# Altium PCB E-41 LIDAR Dev Brd.PcbDoc
Units mil, origin at the board's own origin, x right, y up, seen from the top; angles counter-clockwise.
Board outline 5885.62 x 2540.57 mil, 2 copper layers (Top Layer, Bottom Layer); 41 components, 69 nets, 243 pads, 60 vias.
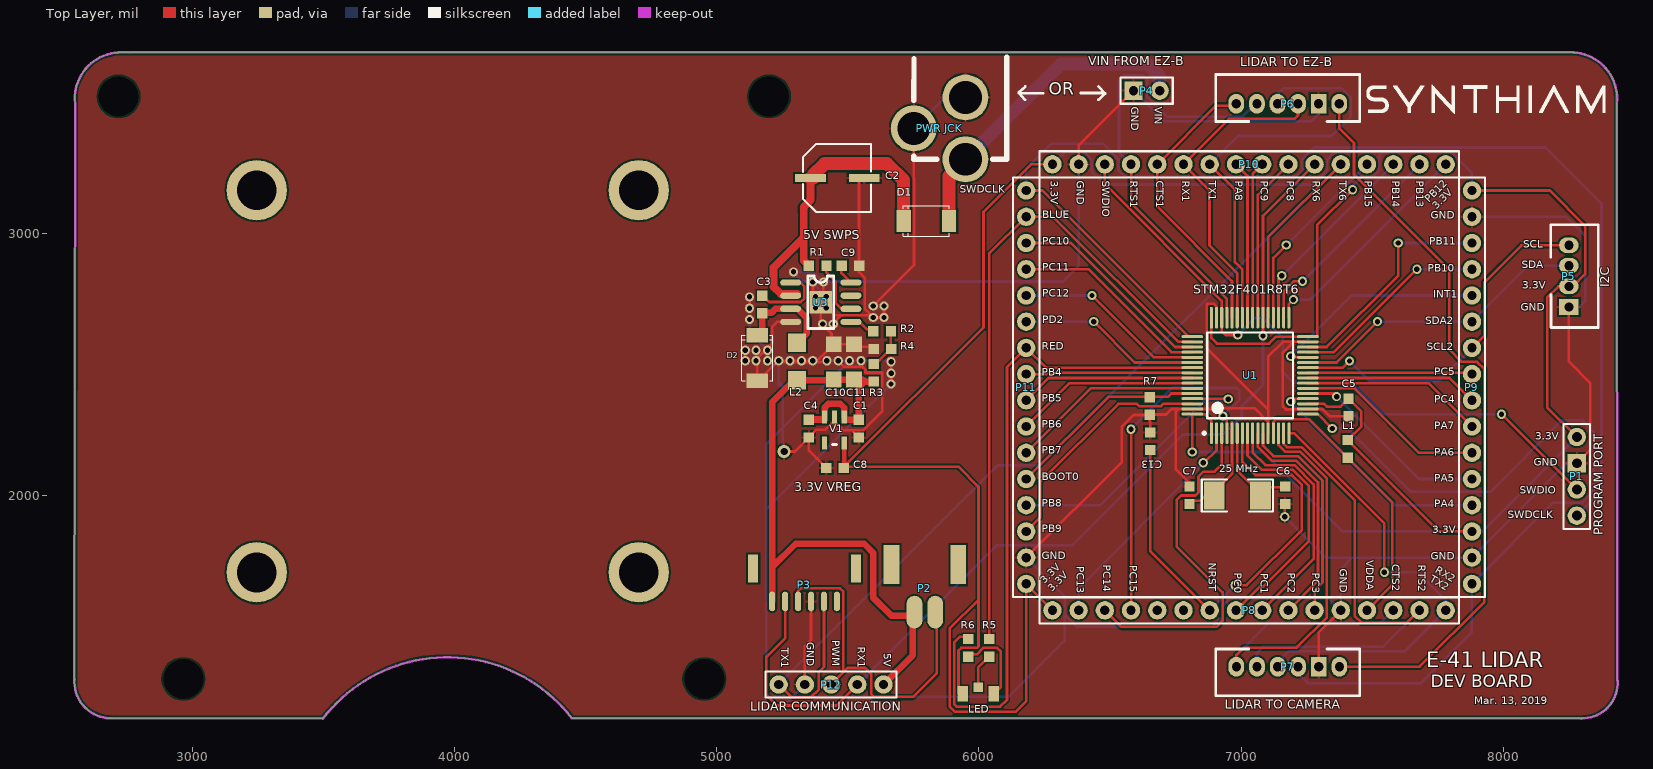
[diagram p0: Top Layer view]
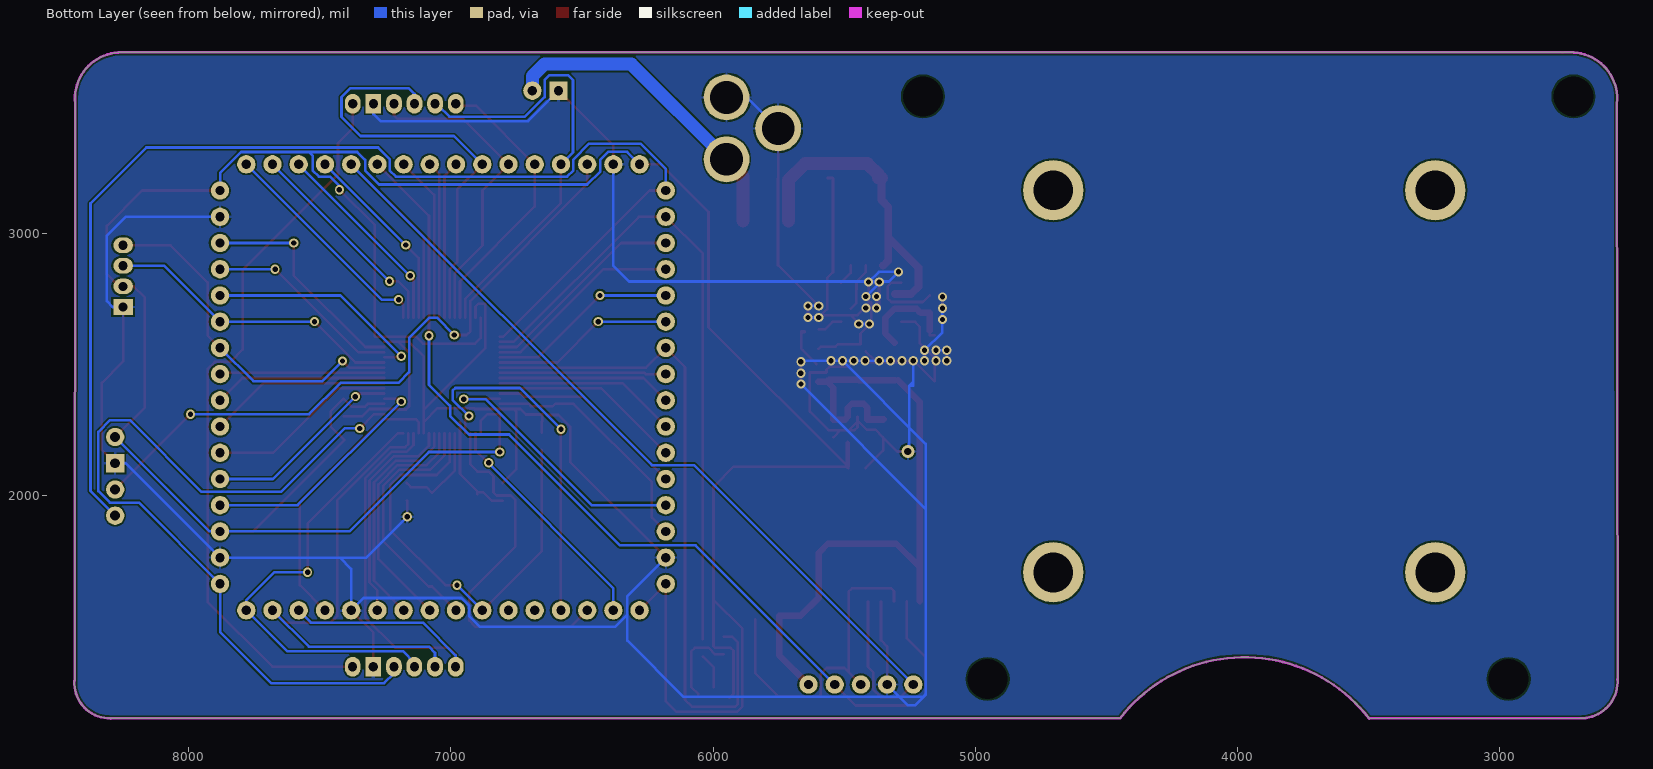
[diagram p1: Bottom Layer view, seen from below]

## Layer stack, top to bottom
Top Layer: signal copper 1.4
Dielectric: dielectric 12.6, FR-4, Dk 4.8
Bottom Layer: signal copper 1.4

## Board outline
2550.34,1299.98 ccw(c2689.42,1289.72) 2695.07,1150.37 3497.51,1149.37 cw(c3973,782.32) 4447.95,1150.07 4448,1150.11 8297.32,1149.55 8297.32,1150.35 ccw(c8300.9,1285.08) 8435.44,1292.97 8434.92,1292.97 8432.36,3495.82 ccw(c8257.9,3514.42) 8254.26,3689.83 8254.26,3689.95 2730.74,3689.95 2730.74,3689.83 ccw(c2727.1,3514.42) 2552.64,3495.82

## Design rules (kind name [scope] priority, off if disabled: settings)
Clearance [All] p1: gap=7
PolygonConnect PolygonConnect_6 [All vs IsNamedPolygon('Top Layer-GND')] p1: connectstyle=Direct reliefconductorwidth=10 reliefentries=4 polygonreliefangle="90 Angle"
PolygonConnect PolygonConnect_5 [All vs IsNamedPolygon('btm Layer-GND')] p2: connectstyle=Direct reliefconductorwidth=10 reliefentries=4 polygonreliefangle="90 Angle"
PolygonConnect PolygonConnect_4 [All vs IsNamedPolygon('Top Layer-GND')] p3: connectstyle=Direct reliefconductorwidth=10 reliefentries=4 polygonreliefangle="90 Angle"
PolygonConnect PolygonConnect_3 [All vs IsNamedPolygon('btm Layer-GND')] p4: connectstyle=Direct reliefconductorwidth=10 reliefentries=4 polygonreliefangle="90 Angle"
PolygonConnect PolygonConnect_2 [All vs IsNamedPolygon('btm Layer-GND')] p5: connectstyle=Direct reliefconductorwidth=10 reliefentries=4 polygonreliefangle="90 Angle"
PolygonConnect PolygonConnect_1 [All vs IsNamedPolygon('Top Layer-GND')] p6: connectstyle=Direct reliefconductorwidth=10 reliefentries=4 polygonreliefangle="90 Angle"
PolygonConnect [All] p7: connectstyle=Relief reliefconductorwidth=10 reliefentries=4 polygonreliefangle="90 Angle"
RoutingVias [All] p1: holewidth=20 width=35 viastyle="Through Hole" minholewidth=20 minwidth=20 maxholewidth=28 maxwidth=50
SilkscreenOverComponentPads [All] p1: minsilkscreentomaskgap=10
SolderMaskExpansion [All] p1: expansion=4
Width Width_6 [InNet('3.3V')] p1: maxlimit=25 minlimit=7 preferedwidth=10 minimp=50.000000 maximp=50.000000 favimp=50.000000
Width Width_5 [InNet('GND')] p2: maxlimit=25 minlimit=10 preferedwidth=10 minimp=50.000000 maximp=50.000000 favimp=50.000000
Width Width_4 [InNet('NetC3_2') OR InNet('NetR11_1') OR InNet('NetC14_2')  OR InNet('NetR8_1') OR InNet('NetR8_2')] p3: maxlimit=50 minlimit=10 preferedwidth=25 minimp=50.000000 maximp=50.000000 favimp=50.000000
Width Width_3 [InNet('5V')] p4: maxlimit=50 minlimit=10 preferedwidth=25 minimp=50.000000 maximp=50.000000 favimp=50.000000
Width Width_2 [InNet('VIN') OR InNet('INPUT')] p5: maxlimit=125 minlimit=10 preferedwidth=50 minimp=50.000000 maximp=50.000000 favimp=50.000000
Width Width_1 [InNet('V+')] p6: maxlimit=125 minlimit=10 preferedwidth=10 minimp=50.000000 maximp=50.000000 favimp=50.000000
Width [All] p7: maxlimit=10 minlimit=10 preferedwidth=10
27 further rules are at their usual default settings.

## Components (designator, comment, footprint, x,y, rotation, side; value= is the part's Value field where it differs from the comment)
"25 MHz" "XTAL" Crystal 6986.5,2000.5 r0 top
C1 "Cap" "0603 TIGHT" 5541,2255 r270 top locked
C2 "35V" "SMD Capacitor 220uf 16V" 5458,3211 r90 top
C3 "100nF" "0603 TIGHT" 5173.68,2728.5 r270 top locked
C4 "Cap" "0603 TIGHT" 5351,2255 r270 top locked
C5 "Cap" "0603 TIGHT" 7409,2336 r270 top
C6 "Cap" "0603 TIGHT" 7167.5,2001 r270 top
C7 "Cap" "0603 TIGHT" 6803,2001 r90 top
C8 "Cap" "0603 TIGHT" 5451,2105 r180 top locked
C9 "Cap" "0603 TIGHT" 5509.68,2876.5 r180 top locked
C10 "10V" 1206 5445.68,2442 r90 top locked
C11 "10V" 1206 5523.18,2442 r90 top locked
C13 "Cap" "0603 TIGHT" 6653,2207 r90 top
D1 "30V 5A" "DIODE SOD-128" 5799,3047 r90 top
D2 "30V 5A" "DIODE SOD-128" 5154.68,2524.3 r0 top locked
L1 "Ferrite" "0603 TIGHT" 7406,2178 r270 top
L2 "Ferrite" "Inductor SMD" 5306.18,2511.5 r270 top locked
LED "BI-CLR" "LED BI-COLOR" 5997,1243 r180 top (schematic designator LED1)
P1 "Header 4" HDR1X4 8280,2223 r270 top
P2 "Header 2" "JST-PH 2-pin" 5793.5,1646 r0 top
P3 "Header 6" "JST-GH 6-pin" 5334.5,1659 r0 top
P4 "Header 2" HDR1X2 6689,3544 r180 top
P5 "JST 4-pin" "JST-PH 4pin" 8252,2837 r90 top
P6 "Camera Port" "JST-PH 6pin"#1 7177.61,3494 r180 top
P7 "Camera Port" "JST-PH 6pin"#2 7178,1347 r0 top
P8 "Header 16" HDR1X16 6280,1562 r0 top
P9 "Header 16" HDR1X16 7880,1663 r90 top
P10 "Header 16" HDR1X16 7780,3263 r180 top
P11 "Header 16" HDR1X16 6180,3163 r270 top
P12 "Header 5" HDR1X5 5636,1279 r180 top
"PWR JCK" "PWR2.1" "POWER JACK SLOTS" 5850,3400 r180 top
R1 "Res1" "0603 TIGHT" 5384.68,2876.5 r180 top locked
R2 "Res1" "0603 TIGHT" 5630.68,2626.5 r180 top locked
R3 "Res1" "0603 TIGHT" 5599.18,2468 r270 top locked
R4 "Res1" "0603 TIGHT" 5631.5,2559 r0 top locked
R5 "Res1" "0603 TIGHT" 6039,1419 r270 top
R6 "Res1" "0603 TIGHT" 5959,1419 r270 top
R7 "Res1" "0603 TIGHT" 6651,2341 r90 top
U1 "STM32F401R8T6" LQFP64_M 7034,2458 r90 top
U3 "RT8299GSP" SOP-8 5396.68,2737 r0 top locked
V1 "SPX3819M5-L-3-3/TR" SOT-25 5411,2200 r0 top locked

## Footprints (in the part's own frame and the unit in brackets; to place one, negate y for a bottom-side part, rotate by r counter-clockwise, add the part's x,y. Pads: shape width x height; smd on the part's side, far side on the other; paste and mask are expansions set on the pad)
"0603 TIGHT" [mm]
  rect 1x1 smd: 1(-0.85,0) 2(0.85,0)
1206 [mil]
  rect 60x60 smd: 1(0,0) 2(135,0)
Crystal [mm] "16Mhz Crystal"
  rect 2x2.7 smd: 1(-2.276,-0.01) 2(2.22,-0.01)
  silkscreen extent -3.48,-1.57 3.43,1.54
"DIODE SOD-128" [mm]
  rect 2.1x1.4 smd: 1(0,-2.2) 2(0,2.2)
  silkscreen extent -1.49,-2.21 1.49,2.23
HDR1X2 [mil] "Connector; Header; 2 Position"
  round 70 hole 35.43: 1(0,0)
  rect 70x70 hole 35.43: 2(100,0)
  silkscreen extent -50,-50 150,50
HDR1X4 [mil] "Connector; Header; 4 Position"
  round 70 hole 38: 1(0,0) 3(200,0) 4(300,0)
  rect 70x70 hole 38: 2(100,0)
  silkscreen extent -50,-50 350,50
HDR1X5 [mil] "Connector; Header; 5 Position"
  round 70 hole 35.43: 1(0,0) 2(100,0) 3(200,0) 4(300,0) 5(400,0)
  silkscreen extent -50,-50 450,50
HDR1X16 [mil] "Connector; Header; 16 Position"
  round 70 hole 35.43: 1(0,0) 2(100,0) 3(200,0) 4(300,0) 5(400,0) 6(500,0) 7(600,0) 8(700,0) 9(800,0) 10(900,0) 11(1000,0) 12(1100,0) 13(1200,0) 14(1300,0) 15(1400,0) 16(1500,0)
  silkscreen extent -50,-50 1550,50
"Inductor SMD" [mil]
  rect 70x70 smd: 1(-71.5,0) 2(71.5,0)
"JST-GH 6-pin" [mm]
  rect 1x2.7 smd: 0(-4.985,1.604) 0(4.985,1.604)
  oval 0.6x1.9 smd: 1(-3.136,-1.604) 2(-1.88,-1.604) 3(-0.624,-1.604) 4(0.632,-1.604) 5(1.887,-1.604) 6(3.143,-1.604)
"JST-PH 2-pin" [mil]
  rect 60x150 smd: 0(-127.24,90.65) 0(127.24,90.65)
  oval 60x125 smd: 1(-39.35,-90.65) 2(39.39,-90.65)
"JST-PH 4pin" [mil]
  rect 60x75 hole 35: 1(-118.11,2.36)
  oval 60x75 hole 35: 2(-39.37,2.36) 3(39.37,2.36) 4(117.32,2.36)
  silkscreen extent -196,-109 195,71
"JST-PH 6pin"#1 [mil]
  oval 60x75 hole 35: 1(-196.46,0) 3(-38.98,0) 4(38.98,0) 5(117.72,0) 6(196.46,0)
  rect 60x75 hole 35: 2(-117.72,0)
  silkscreen extent -274,-111 274,68
"JST-PH 6pin"#2 [mil]
  oval 60x75 hole 35: 1(-196.46,0) 2(-117.72,0) 3(-38.98,0) 4(38.98,0) 6(196.46,0)
  rect 60x75 hole 35: 5(117.72,0)
  silkscreen extent -274,-111 274,68
"LED BI-COLOR" [mm]
  rect 1x1.5 smd: 1(-1.5,0) 2(1.5,0)
  rect 0.9x0.9 smd: 3(0,-0.656)
LQFP64_M [mm] "Thin QFP, 64-Leads, Body 10x10mm, Pitch 0.5mm, IPC Low Density"
  oval 2.1x0.3 smd: 1(-5.6,3.75) 2(-5.6,3.25) 3(-5.6,2.75) 4(-5.6,2.25) 5(-5.6,1.75) 6(-5.6,1.25) 7(-5.6,0.75) 8(-5.6,0.25) 9(-5.6,-0.25) 10(-5.6,-0.75) 11(-5.6,-1.25) 12(-5.6,-1.75) 13(-5.6,-2.25) 14(-5.6,-2.75) 15(-5.6,-3.25) 16(-5.6,-3.75) 33(5.6,-3.75) 34(5.6,-3.25) 35(5.6,-2.75) 36(5.6,-2.25) 37(5.6,-1.75) 38(5.6,-1.25) 39(5.6,-0.75) 40(5.6,-0.25) 41(5.6,0.25) 42(5.6,0.75) 43(5.6,1.25) 44(5.6,1.75) 45(5.6,2.25) 46(5.6,2.75) 47(5.6,3.25) 48(5.6,3.75)
  oval 0.3x2.1 smd: 17(-3.75,-5.6) 18(-3.25,-5.6) 19(-2.75,-5.6) 20(-2.25,-5.6) 21(-1.75,-5.6) 22(-1.25,-5.6) 23(-0.75,-5.6) 24(-0.25,-5.6) 25(0.25,-5.6) 26(0.75,-5.6) 27(1.25,-5.6) 28(1.75,-5.6) 29(2.25,-5.6) 30(2.75,-5.6) 31(3.25,-5.6) 32(3.75,-5.6) 49(3.75,5.6) 50(3.25,5.6) 51(2.75,5.6) 52(2.25,5.6) 53(1.75,5.6) 54(1.25,5.6) 55(0.75,5.6) 56(0.25,5.6) 57(-0.25,5.6) 58(-0.75,5.6) 59(-1.25,5.6) 60(-1.75,5.6) 61(-2.25,5.6) 62(-2.75,5.6) 63(-3.25,5.6) 64(-3.75,5.6)
  silkscreen extent -5.72,-4.15 4.15,4.57, body extent -5,-5 5,5, height 1.6
"POWER JACK SLOTS" [mil] "2.1mm slotted footprint"
  round 175 hole 125: 1(-98.5,118) 2(98.5,0) 3(-98.5,-118)
  silkscreen extent -256,-271 99,118
"SMD Capacitor 220uf 16V" [mm]
  rect 0.8x3 smd: 1(0,2.55) 2(0,-2.65)
  silkscreen extent -3.3,-3.3 3.3,3.3
SOP-8 [mil] "Similar to SO-8 but with PAD"
  oval 80x24 smd: 1(-115,75) 2(-115,25) 3(-115,-25) 4(-115,-75) 5(115,-75) 6(115,-25) 7(115,25) 8(115,75)
  rect 84.65x84.65 smd: 9(0,0)
  silkscreen extent -50,-100 50,100
SOT-25 [mil]
  rect 20x50 smd: 1(0,0) 2(75,0) 3(38,100) 4(0,100) 5(75,100)
  silkscreen extent 30,-5 45,-5

## Part data
"25 MHz": "Crystal Oscillator"
C1 C4 C5 C6 C7 C8 C9 C13: "Capacitor"
C2 C10 C11: library part "Cap Pol1", "Polarized Capacitor (Radial)"
C3: library part Cap, "Capacitor"
D1 D2: library part "Diode 1N4148", "High Conductance Fast Diode"
L1 L2: library part Inductor, "Inductor"
LED: library part "LED BI-COLOR"
P1: "Header, 4-Pin"
P2 P4: "Header, 2-Pin"
P3: "Header, 6-Pin"
P5: library part "Header 4", "Header, 4-Pin"
P6 P7: library part "Header 6", "Header, 6-Pin"
P8 P9 P10 P11: "Header, 16-Pin"
P12: "Header, 5-Pin"
"PWR JCK": library part PWR2.5, "Low Voltage Power Supply Connector"
R1 R2 R3 R4 R5 R6 R7: "Resistor"
U1: "STM32 ARM MCU"
U3: library part RT8299
V1: library part "Vreg SOT25"

## Free pads (board coordinates)
  round 0 hole 152: 0(2718.5,3522) 0(2965.5,1300.3) 0(4952.5,1300.3) 0(5199.5,3522)
  round 230 hole 152: 0(3245.5,1707) 0(3245.5,3164) 0(4702.5,1707) 0(4702.5,3164)

## Via types
v1: diameter 35, hole 20, Top Layer to Bottom Layer, tented both sides, 59 vias
v2: diameter 50, hole 28, Top Layer to Bottom Layer, tented both sides, 1 vias

## Nets (pads, with @x,y where several pads share a name; then routed paths per layer and width w, separated by ;. In a path a pad name is that pad's centre, name@x,y a point inside that pad or via, vN(x,y) a via of type N, cw(c..) or ccw(c..) an arc to the next point about the centre after c; other vN are vias at no path point)
2: P8.2 U1.2 | length 901.3
  Top Layer w10: v1(6855,2125) 6858.95,2125 6906.05,2172.1 U1.2
  Bottom Layer w10: P8.2 6380,1646.05 6858.95,2125 v1(6855,2125)
3: P8.3 U1.3 | length 1399.4
  Top Layer w10: P8.3 6543,1499 6905,1499 6929,1523 6929,1630 6754,1805 6754,1983 6771,2000 6825,2000 6837,2012 6837,2072 6856,2091 6898,2091 6925.73,2118.73 U1.3
3.3V: C5.1 C8.1 L1.1 LED.2 P1.1 P5.2 P8.1 P9.3 P9.16 P10.16 P11.16 U1.1 U1.19 U1.32 U1.48 U1.64 V1.2 | length 12051.4
  Top Layer w10: C8.1 5484.46,2110 C8.1@5486,2110 ; LED.2@5937.94,1228.06 5922,1244 5922,1408 5933,1419 5992,1419 5998,1425 5998,2033 5921,2110 C8.1@5486,2110 ; 5998,1602 5888,1492 5888,1196 5909,1175 6140,1175 6180,1215 P11.16@6180,1662 ; P11.16 P11.16@6180,1662 ; P8.1 P11.16@6180,1662 ; P10.16 6198,3263 6017,3082 6017,2641 C8.1@5486,2110 ; v1(6813.53,2166) U1.64 6860,2310.36 6886.36,2284 U1.1 ; U1.48 6886.36,2600 6906.94,2579.42 7105.85,2579.42 7132.07,2605.64 U1.32 7290,2605.64 7290,3031 v1(7425,3166) ; U1.19 7316.27,2349.73 7327,2339 7378.54,2339 C5.1 7458,2320.46 7458,2263.46 L1.1 7754.46,1863 P9.3 ; P9.16 8177,3163 8312,3028 8312,2844 8265.63,2797.63 P5.2 8210,2797.63 8167,2754.63 8167,2336 P1.1
  Top Layer w18: C8.1@5486,2110 V1.2
  Bottom Layer w10: P10.16 6328,3311 6400,3311 6430,3281 6430,3236 6480,3186 7273,3186 7327,3240 7327,3280 7357,3310 7541,3310 ; v1(6813.53,2166) 7084,2166 7387,1863 P9.3 7920,1863 P1.1 ; v1(7425,3166) 7425,3180 7461,3216 7503,3216 7527,3240 7527,3296 7541,3310 ; P9.16 7880,3230 7800,3310 7541,3310
4: P8.4 U1.4 | length 1367.3
  Top Layer w10: P8.4 v1(6580,2253) ; v1(6931,2303) 6945.42,2288.58 U1.4
  Bottom Layer w10: v1(6580,2253) 6737,2410 6983,2410 6993,2400 6993,2365 v1(6931,2303)
5V: C1.1 C4.1 C10.1 C11.1 L2.2 P2.1 P3.1 P12.1 R3.2 V1.4 V1.5 | length 2788.6
  Top Layer w10: L2.2@5295.5,2440 L2.2 ; C10.1@5443.68,2440 C10.1
  Top Layer w25: P3.1 5211.05,1726.05 ; L2.2@5295.5,2440 5211.05,2355.55 5211.05,1726.05 ; L2.2 5435.68,2440 C10.1@5443.68,2440 ; C4.1@5349.46,2290 V1.4@5411,2290 ; C4.1 5411,2288.46 V1.4@5411,2290 ; C10.1 5557.5,2442 5564.96,2434.54 ; R3.2@5598.68,2434.54 5564.46,2434.54 5541,2411.07 C1.1 5497.54,2288.46 V1.5 5486,2335 5471,2350 5426,2350 5411,2335 V1.4 V1.4@5411,2290 ; P12.1 5747,1390 5747,1542 5665,1542 5596,1611 5596,1782 5562,1816 5301,1816 5211.05,1726.05
8: P8.8 U1.8 | length 964.7
  Top Layer w10: P8.8 7071,1653 7085,1653 7258,1826 7258,2036.75 7196.75,2098 7079,2098 7024.16,2152.84 U1.8
9: P8.9 U1.9 | length 917.9
  Top Layer w10: U1.9 7043.84,2164 7091.84,2116 7202.79,2116 7276,2042.79 7276,1758 P8.9
10: P8.10 U1.10 | length 872.4
  Top Layer w10: U1.10 7063.53,2185.47 7116,2133 7209.83,2133 7293,2049.83 7293,1675 P8.10
11: P8.11 U1.11 | length 836.9
  Top Layer w10: U1.11 7083.21,2189.83 7123.04,2150 7216.88,2150 7310,2056.88 7310,1667.96 7280,1637.96 P8.11
20: P9.4 U1.20 | length 924.8
  Top Layer w10: v1(7189,2358) 7200.42,2369.42 U1.20
  Bottom Layer w10: v1(7189,2358) 7584,1963 P9.4
21: P9.5 U1.21 | length 760.6
  Top Layer w10: U1.21 7351.9,2389.1 v1(7364,2377)
  Bottom Layer w10: v1(7364,2377) 7678,2063 P9.5
22: P9.6 U1.22 | length 727.3
  Top Layer w10: U1.22 7433.05,2408.79 7678.84,2163 P9.6
23: P9.7 U1.23 | length 694.1
  Top Layer w10: U1.23 7714.53,2428.47 P9.7
24: P9.8 U1.24 | length 660.8
  Top Layer w10: U1.24 7794.84,2448.16 P9.8
25: P9.9 U1.25 | length 627.5
  Top Layer w10: U1.25 7875.16,2467.84 P9.9
29: P9.13 U1.29 | length 756.6
  Top Layer w10: U1.29 7353.58,2546.58 v1(7670,2863)
  Bottom Layer w10: v1(7670,2863) P9.13
30: P9.14 U1.30 | length 862.2
  Top Layer w10: U1.30 7325.77,2566.27 7599,2839.5 v1(7599,2963)
  Bottom Layer w10: v1(7599,2963) P9.14
33: P10.1 U1.33 | length 870.5
  Top Layer w10: U1.33 7181.64,2729.64 v1(7199,2747)
  Bottom Layer w10: v1(7199,2747) 7264,2747 P10.1
34: P10.2 U1.34 | length 819
  Top Layer w10: U1.34 7161.95,2778.9 7200.05,2817 v1(7234,2817)
  Bottom Layer w10: v1(7234,2817) P10.2
35: P10.3 U1.35 | length 765.8
  Top Layer w10: U1.35 7142.27,2825.27 v1(7155,2838)
  Bottom Layer w10: v1(7155,2838) P10.3
36: P10.4 U1.36 | length 732.6
  Top Layer w10: U1.36 7122.58,2905.58 v1(7172,2955)
  Bottom Layer w10: v1(7172,2955) P10.4
39: P10.7 U1.39 | length 632.8
  Top Layer w10: U1.39 7063.53,3146.53 P10.7
40: P10.8 U1.40 | length 599.5
  Top Layer w10: U1.40 7043.84,3226.84 P10.8
41: P10.9 U1.41 | length 602.8
  Top Layer w10: P10.9 7024.16,3218.84 U1.41
51: P11.3 U1.51 | length 797.9
  Top Layer w10: P11.3 6350.92,2963 6747.65,2566.27 U1.51
52: P11.4 U1.52 | length 764.6
  Top Layer w10: P11.4 6416.92,2863 6733.33,2546.58 U1.52
53: P11.5 U1.53 | length 731.3
  Top Layer w10: v1(6431,2763) 6667.1,2526.9 U1.53
  Bottom Layer w10: P11.5 v1(6431,2763)
54: P11.6 U1.54 | length 698.1
  Top Layer w10: v1(6438,2663) 6593.79,2507.21 U1.54
  Bottom Layer w10: P11.6 v1(6438,2663)
56: P11.8 U1.56 | length 635.5
  Top Layer w10: P11.8 6255.96,2463 6260.8,2467.84 U1.56
57: P11.9 U1.57 | length 668.8
  Top Layer w10: P11.9 6265.16,2448.16 U1.57
58: P11.10 U1.58 | length 702.1
  Top Layer w10: P11.10 6345.47,2428.47 U1.58
59: P11.11 U1.59 | length 735.3
  Top Layer w10: P11.11 6425.79,2408.79 U1.59
61: P11.13 U1.61 | length 1075.8
  Top Layer w10: U1.61 6948.58,2369.42 v1(6950.5,2367.5)
  Bottom Layer w10: P11.13 6463,1963 6867.5,2367.5 v1(6950.5,2367.5)
62: P11.14 U1.62 | length 921.5
  Top Layer w10: P11.14 6233,1916 6233,2051 6531.73,2349.73 6602.18,2349.73 6610.91,2341 6694,2341 6702.73,2349.73 U1.62
BLUE: P11.2 R5.1 U1.50 | length 2500.1
  Top Layer w10: R5.1 6039,2922 P11.2 6283.14,3063 6760.19,2585.95 U1.50
BOOT0: P11.12 R7.2 U1.60 | length 768.6
  Top Layer w10: P11.12 6493,2376 6720.26,2376 6733.36,2389.1 U1.60
CTS1: P6.6 P10.12 U1.44 | length 1103.6
  Top Layer w10: U1.44 6965.1,2816.9 6680,3102 P10.12 6904,3487 6981.15,3487 P6.6
CTS2: P7.1 P8.14 U1.14 | length 1974
  Top Layer w10: P7.1 6981.54,1391.54 7010,1420 7211.47,1420 7327,1535.53 7327,2063.92 7223.92,2167 7167.37,2167 7142.27,2192.1 U1.14
  Bottom Layer w10: P7.1 6981.54,1390 7106.54,1515 7533,1515 P8.14
GND: "PWR JCK.2" "PWR JCK.3" C1.2 C2.2 C4.2 C5.2 C6.2 C7.2 C8.2 C9.1 C10.2 C11.2 C13.2 D2.1 P1.2 P3.4 P4.2 P5.1 P6.2 P7.5 P8.12 P9.2 P9.15 P10.15 P11.15 P12.4 R4.1 R7.1 U1.12 U1.18 U1.31 U1.47 U1.63 U3.4 U3.9 V1.3 | length 20663.4
  Top Layer w10: v1(5108.78,2514) v1(5108.78,2554) ; v1(5125.18,2714.3) v1(5125.18,2757.6) ; v1(5149.78,2514) v1(5149.78,2554) ; v1(5193.08,2514) v1(5193.08,2554) ; v1(5236.38,2514) v1(5279.68,2514) v1(5322.98,2514) v1(5366.28,2514) 5381.5,2514 C10.2@5417.5,2550 ; v2(5257,2168) 5297.46,2168 C4.2 ; U3.4 5229.68,2662 5211.68,2644 5211.68,2581.3 5154.68,2524.3 5154.68,2435.39 5227.29,2508 5413.78,2508 v1(5419.78,2514) ; P12.4 5336,1425 5359.36,1448.36 P3.4 ; v1(5365.68,2814) 5367,2812.68 5367,2724 v1(5376,2715) v1(5376,2759) ; v1(5406.68,2814) 5406.68,2740 5406.68,2725.32 v1(5417,2715) ; U3.9@5417,2724 U3.9@5426,2715 ; C8.2 5351,2171.54 C4.2 ; V1.3 V1.3@5449,2286.03 ; 5455.58,2668.08 5475.5,2688 ; v1(5463.08,2514) 5486.08,2491 5556,2491 5567,2480 5567,2469 5631,2469 5631,2320 5560,2249 5513.54,2249 ; C11.2@5532.68,2568 5523.68,2577 C10.2 ; C1.2 5513.54,2249 ; C2.2 5542.14,3211 5542.14,3204 5542.14,2877 5542.14,2851.54 5564.68,2829 5564.68,2711 v1(5596.68,2679) ; v1(5596.68,2723) 5752,2878.32 5752,3210 5751.5,3210.5 5751.5,3400 ; R4.1 5597.21,2559 5588.21,2568 5587.71,2568 5532.18,2568 C11.2 C10.2 ; v1(5637.68,2679) v1(5596.68,2679) ; v1(5637.68,2723) 5637.68,2688 v1@5646.68,2679 ; v1(5664.68,2425) 5664.68,2465.68 v1(5665,2466) v1(5665,2510) ; P11.15 6545.14,2128.14 6545.14,2262.81 6589.33,2307 R7.1@6633.46,2307 ; P10.15 6380,3335 P4.2 ; C13.2 6653,2281 6651,2283 6651,2309 6713.46,2309 6734.51,2330.05 6761.05,2330.05 ; C7.2@6803,2047.46 6751,2099.46 6751,2320 6761.05,2330.05 ; U1.47 6906.05,2720 6894.05,2732 6868,2732 6868,2563 7102.9,2328.1 ; U1.12 7102.9,2280 ; v1(7166,1919) 7166,1979.04 C6.2@7167.5,1980.54 ; U1.31 7200,2585.95 ; P7.5 7295.72,1477.72 P8.12 ; C5.2 7337.35,2302.54 7309.84,2330.05 U1.18 7203.03,2330.05 7201,2328.02 7170,2328.02 7159.13,2338.89 7159.13,2545.08 7200,2585.95 ; P5.1 8249.64,2511.36 8331,2430 8331,2174 P1.2 ; C4.2 5380.46,2251 5413.97,2251 V1.3@5449,2286.03 ; C10.2 5437.68,2577 5437.68,2617 5396.68,2658 U3.9 5399,2737 5448,2688 5475.5,2688 ; V1.3@5449,2282 V1.3@5449,2286.03 ; V1.3@5449,2282 5482,2249 ; V1.3@5449,2282 5449,2260 5460,2249 5482,2249 ; 5475.5,2688 5587.68,2688 v1(5596.68,2679) ; 5482,2249 5513.54,2249 ; 6761.05,2330.05 U1.63 6908.45,2330.05 6911.28,2332.87 7050.03,2332.87 7102.9,2280 ; 7102.9,2280 7102.9,2328.1 ; 7102.9,2328.1 7102.9,2529.85 7159,2585.95 7200,2585.95
  Bottom Layer w10: v1(5108.78,2554) v1(5149.78,2554) ; v1(5125.18,2714.3) v1(5125.18,2671) 5125.18,2621.9 v1(5193.08,2554) ; v1(5236.38,2514) 5236.38,2433.45 ; 5251.24,2418.59 5236.38,2433.45 ; v2(5257,2168) 5251,2174 5251,2418.59 5236.38,2418.59 5236.38,2433.45 ; v1(5322.98,2514) v1(5366.28,2514) v1@5412.28,2514 ; P12.4 5289,1232 ; v1(5403.68,2654) v1(5443.98,2654) ; v1(5417,2759) 5365.68,2810.32 v1(5365.68,2814) v1(5406.68,2814) 5367.68,2853 v1(5292.68,2853) 5329.68,2816 6320,2816 6380,2876 P10.15 ; v1@5420.28,2514 v1@5660.5,2514 ; v1(5506.38,2514) 5189,2196.62 5189,1949.32 ; v1(5596.68,2679) v1(5637.68,2679) ; v1(5596.68,2723) v1(5637.68,2723) ; v1@5661,2514 v1(5665,2510) ; v1(5664.68,2425) 5189,1949.32 ; 5751.5,3400 5869.5,3518 5948.5,3518 ; P11.15 6327,1616 ; P4.2 6705.5,3427.5 7267.82,3427.5 7295.32,3455 P6.2 ; v1(7166,1919) 7322,1763 7423,1763 ; P9.15 8240,3063 8312,2991 8312,2740.89 8290,2718.89 P5.1 ; P1.2 8240,2123 P9.2 7423,1763 ; 5189,1243 5200,1232 5289,1232 ; 5189,1243 5189,1240 5229,1200 5257,1200 5289,1232 ; 5189,1243 5189,1949.32 ; 5289,1232 6112,1232 6327,1447 6327,1616 ; 6327,1616 6327,1546 6374,1499 6889,1499 6930,1540 6930,1580 6959,1609 7333,1609 P8.12 7380,1720 7423,1763
  other v1: 5549.68,2514
INPUT: "PWR JCK.1" D1.1 P4.1 | length 1226
  Top Layer w50: D1.1 5885.61,3219.11 5948.5,3282
  Bottom Layer w50: 5948.5,3282 6311.5,3645 6643,3645 6689,3599 P4.1
INT1: P9.12 U1.28 | length 854.3
  Top Layer w10: v1(7189,2531) 7193.1,2526.9 U1.28
  Bottom Layer w10: v1(7189,2531) 7421,2763 P9.12
"Net25 MHz_1": "25 MHz.1" C7.1 U1.5 | length 409.8
  Top Layer w10: C7.1@6803,1980.54 6844,1980.54 6876.57,2013.11 6896.9,2013.11 ; 6899,2005 6899,2016 6965.1,2082.1 6965.1,2280
"Net25 MHz_2": "25 MHz.2" C6.1 U1.6 | length 375.2
  Top Layer w10: U1.6 6984.79,2096.21 7070.9,2010.1 7092.8,2032 7152.04,2032 C6.1@7167.5,2047.46
NetC3_1: C3.1 U3.1 | length 281
  Top Layer w10: C3.1 5173.68,2763.46 5199.14,2738 5319.62,2738 5333.68,2752.06 5333.68,2797 5318.68,2812 U3.1
NetC3_2: C3.2 D2.2 L2.1 U3.3 | length 405.5
  Top Layer w10: D2.2 5173.68,2610.92 D2.2@5173.68,2627.61
  Top Layer w25: D2.2@5173.68,2627.61 5173.68,2696.54 5208.21,2696.54 5223.68,2712 U3.3 5307.68,2712 5343.68,2676 5343.68,2618.5 5308.68,2583.5 L2.1
NetC9_2: C9.2 U3.8 | length 80.1
  Top Layer w10: C9.2@5475.21,2877 5475.21,2848.46 U3.8
NetLED1_1: LED.1 R6.2 | length 313.1
  Top Layer w10: R6.2@5959,1394.54 5991.58,1394.54 6016.04,1419 6069,1419 6083,1405 6083,1269.94 LED.1
NetLED1_3: LED.3 R5.2 | length 134.1
  Top Layer w10: LED.3 5997,1343.54 R5.2
NetR1_1: R1.1 U3.6 | length 188.5
  Top Layer w10: R1.1@5417.14,2877 5417.14,2851.54 5452.68,2816 5452.68,2785.44 ; 5453,2785.12 5453,2734 U3.6@5475,2712
NetR2_1: R2.1 R3.1 R4.2 | length 183.7
  Top Layer w10: R3.1@5605.78,2501.46 5660.28,2555.96 R4.2@5657.64,2555.96 ; R2.1@5657.64,2621 5663.14,2621 5663.14,2623 5650.5,2623 5650.5,2626.5 R2.1 R4.2@5664.14,2559.82
NetR2_2: R2.2 U3.5 | length 96.4
  Top Layer w10: U3.5 5545,2662 5573.54,2633.46 R2.2@5596.21,2633.46
NRST: C13.1 P8.7 U1.7 | length 1727.9
  Top Layer w10: C13.1 6653,1789 P8.7 ; v1(6976,1658) 7021,1658 7231,1868 7231,2039.71 7192.71,2078 7054,2078 7004.47,2127.53 U1.7
  Bottom Layer w10: P8.7 v1(6976,1658)
PWM: P2.2 P3.3 P12.3 | length 1293
  Top Layer w10: P3.3 5309.93,1635.93 5320,1646 5470,1646 5483,1633 5483,1326 ; P12.3 5483,1326 ; P2.2@5838.89,1528.35 5838.89,1321.89 5749,1232 5600,1232 5589,1243 5589,1320 5567,1342 5499,1342 5483,1326
RED: P11.7 R6.1 U1.55 | length 2551.2
  Top Layer w10: R6.1@5959,1461.46 5927.46,1461.46 5905,1439 5905,1205 5915,1195 6081,1195 6107,1221 6107,2490 P11.7 6255.47,2487.53 U1.55
RTS1: P6.5 P10.13 U1.45 | length 1738
  Top Layer w10: P10.13 6580,3115.42 6945.42,2750 U1.45
  Bottom Layer w10: P10.13 6534,3309 6534,3584 6553,3603 6624,3603 6642,3585 6642,3520 6717.5,3444.5 7005.5,3444.5 7048,3487 7059.89,3487 P6.5
RTS2: P7.2 P8.15 U1.15 | length 1859.6
  Top Layer w10: U1.15 7161.95,2196.46 7174.22,2184.19 7230.77,2184.19 7433,1981.96 7433,1540 7458,1515 7633,1515 P8.15
  Bottom Layer w10: P7.2 7060.28,1400 7083.57,1423.28 7541.28,1423.28 P8.15
RX1: P6.3 P10.11 U1.43 | length 1227.4
  Top Layer w10: U1.43 6984.79,2848.21 6879,2954 6879,3164 P10.11 6953.58,3436.58 7203.16,3436.58 7216.58,3450 P6.3
RX2: P7.4 P9.1 U1.17 | length 3149.3
  Top Layer w10: U1.17 7292.84,2310.36 v1(7347.2,2256)
  Bottom Layer w10: P7.4 7216.98,1321.02 7254,1284 7685,1284 7880,1479 P9.1 8190,1973 8300,1973 8344,2017 8344,2243 8300,2287 8223,2287 7950,2014 7647,2014 7405,2256 v1(7347.2,2256)
RX6: P3.2 P10.6 P12.2 U1.38 | length 3747.5
  Top Layer w10: P3.2 5260.49,1455.49 5189,1384 5189,1240 5230,1199 5456,1199 P12.2 ; v1(7083.21,2609) U1.38 7083.21,3066.21 P10.6
  Bottom Layer w10: P12.2 6067,1810 6355,1810 6777.5,2232.5 6930.77,2232.5 7002.27,2304 7002.27,2341.27 7083.21,2422.21 v1(7083.21,2609)
SCL: P5.4 P9.10 U1.26 | length 1371.2
  Top Layer w10: U1.26 7387.53,2487.53 v1(7413,2513) ; P9.10 7927,2610 7927,2813 8068.32,2954.32 P5.4
  Bottom Layer w10: v1(7413,2513) 7490,2436 7753,2436 P9.10
SDA: P5.3 P9.11 U1.27 | length 1148.1
  Top Layer w10: U1.27 7363.95,2507.21 v1(7519.74,2663)
  Bottom Layer w10: v1(7519.74,2663) P9.11 8093.37,2876.37 P5.3
SWDCLK: P1.4 P11.1 U1.49 | length 4646.1
  Top Layer w10: P11.1 6242,3163 6799.36,2605.64 U1.49
  Bottom Layer w10: P11.1 6180,3245 6277,3342 6472,3342 6533,3281 6533,3240 6557,3216 7209,3216 7233,3240 7233,3283 7277,3327 8161,3327 8374,3114 8374,2017 P1.4
SWDIO: P1.3 P10.14 U1.46 | length 2555.8
  Top Layer w10: P10.14 6480,3188 6925.73,2742.27 U1.46 6925.73,2626.27 6940,2612 v1(6987,2612) ; v1(7993,2310) P1.3
  Bottom Layer w10: v1(6987,2612) 7053,2678 7081,2678 7159,2600 7159,2471 7200,2430 7420,2430 7540,2310 v1(7993,2310)
TX1: P6.4 P10.10 U1.42 | length 1662.6
  Top Layer w10: P10.10 6976,3167 6976,2890 7004.47,2861.53 U1.42
  Bottom Layer w10: P10.10 6988,3371 7344,3371 7417,3444 7417,3520 7384,3553 7160,3553 7138.63,3531.63 P6.4
TX2: P7.3 P8.16 U1.16 | length 1748.8
  Top Layer w10: U1.16 7201.47,2237.53 7546,1893 v1(7546,1707)
  Bottom Layer w10: P7.3 7139.02,1362.02 7183,1406 7624,1406 P8.16 7780,1601 7674,1707 v1(7546,1707)
TX6: P3.5 P10.5 P12.5 U1.37 | length 4194.1
  Top Layer w10: P12.5 5284,1231 5360,1231 5389,1260 5389,1326 5408.8,1345.8 P3.5 ; U1.37 7102.9,2985.9 P10.5
  Bottom Layer w10: P12.5 6073,2116 6233,2116 P10.5
VCC: P6.1 P7.6 | length 2819
  Top Layer w10: P6.1 7374.06,3400 7430,3344.06 7430,3223.6 7794,2859.6 7794,2556 7840,2510 7900,2510 7927,2483 7927,1594 7680,1347 P7.6
VDDA: L1.2 P8.13 U1.13 | length 1083.8
  Top Layer w10: U1.13 7122.58,2280 7133.58,2291 7259.54,2291 L1.2 7576,1974.54 7576,1658 P8.13
VIN: C2.1 D1.2 R1.2 U3.2 | length 1289
  Top Layer w10: U3.2 5306.68,2762 U3.2@5306.68,2769
  Top Layer w30: U3.2@5306.68,2769 5243.68,2769 5216.5,2796.18 5216.5,2869 5331.5,2984 ; R1.2 5331.5,2896.21 5331.5,3100.5 5357.61,3126.61 C2.1
  Top Layer w50: C2.1 5368.3,3211 5368.3,3223.3 5411,3266 5649,3266 5712.39,3202.61 D1.2
pads on no net: P2.0 P3.0 P3.6 P8.5 P8.6 U3.7 V1.1
copper on no net: | length 0.1
  Top Layer w10: 2760,3689.9 2760.05,3689.95

## Polygon pours and split planes (outlines as drawn)
GND on Bottom Layer "btm Layer-GND" (solid, pour order 6): 5070.85,2409.63 5070.85,2613 5096.85,2639.48 5096.85,2926.73 5130.14,2960.63 5130.14,3033.62 5215.94,3121 5304.06,3121 5321.48,3138.74 5601.9,3138.74 5601.9,2823.77 5636.42,2788.61 5639.08,2791.32 5707.47,2791.32 5723.11,2775.39 5723.02,2775.3 5723.02,2579.01 5807.81,2558.29 5823.1,2399.19 5081.11,2399.18
GND on Bottom Layer "btm lyr" (solid, pour order 8): 2550.34,1299.98 ccw(c2689.42,1289.72) 2695.07,1150.37 3497.51,1149.37 cw(c3973,782.32) 4447.95,1150.07 4448,1150.11 8297.32,1149.55 8297.32,1150.35 ccw(c8300.9,1285.08) 8435.44,1292.97 8434.92,1292.97 8432.36,3495.82 ccw(c8257.9,3514.42) 8254.26,3689.83 8254.26,3689.95 2730.74,3689.95 2730.74,3689.83 ccw(c2727.1,3514.42) 2552.64,3495.82
GND on Top Layer "Top lyr" (solid, pour order 7): 2550.34,1299.98 ccw(c2689.42,1289.72) 2695.07,1150.37 3497.51,1149.37 cw(c3973,782.32) 4447.95,1150.07 4448,1150.11 8297.32,1149.55 8297.32,1150.35 ccw(c8300.9,1285.08) 8435.44,1292.97 8434.92,1292.97 8432.36,3495.82 ccw(c8257.9,3514.42) 8254.26,3689.83 8254.26,3689.95 2730.74,3689.95 2730.74,3689.83 ccw(c2727.1,3514.42) 2552.64,3495.82
GND on Top Layer "Top Layer-GND" (solid, pour order 3): 5083.49,2394.33 5083.49,2599.01 5098.02,2648.24 5098.02,2788.45 5100.42,2915.68 5157.18,2922.87 5196.06,2941.41 5232.13,2995.3 5278.33,3002.25 5315.98,3110.29 5333.35,3128.14 5612.89,3128.14 5612.89,2811.14 5647.3,2775.75 5649.95,2778.48 5728,2783.82 5740.39,2776.86 5743.78,2739.78 5733.63,2564.81 5820.41,2535.84 5699,2398 5093.72,2383.82

## Keep-outs
Keep-Out Layer:
  lines w10: 2550.09,1299.98 2552.64,3495.82 cw(c2727.1,3514.42) 2730.74,3689.83 ; 2550.34,1299.98 ccw(c2689.42,1289.72) 2695.07,1150.37 3497.51,1149.37 cw(c3973,782.32) 4447.95,1150.07 ; 2730.74,3689.95 8254.26,3689.95 ; 4448,1150.11 8297.32,1149.55 ; 8254.26,3689.83 cw(c8257.9,3514.42) 8432.36,3495.82 8434.92,1292.97 ; 8297.32,1150.35 ccw(c8300.9,1285.08) 8435.44,1292.97

## Silkscreen, mask and mechanical layers (free items; w line width, h text height)
Top Overlay:
  drawing of 2266 lines, arcs and shapes, not listed
  text "VIN FROM EZ-B" at 6416,3630 h60
  text "LIDAR TO EZ-B" at 6997,3626 h60
  text "OR" at 6266,3513 h80
  text "GND" at 6571,3482 h50 r270
  text "VIN" at 6661,3482 h50 r270
  text "3.3V" at 6264,3200 h50 r270
  text "GND" at 6363,3200 h50 r270
  text "SWDIO" at 6461,3200 h50 r270
  text "RTS1" at 6567,3200 h50 r270
  text "CTS1" at 6666,3200 h50 r270
  text "RX1" at 6765,3200 h50 r270
  text "TX1" at 6866,3200 h50 r270
  text "PA8" at 6967,3200 h50 r270
  text "PC9" at 7066,3200 h50 r270
  text "PC8" at 7165,3200 h50 r270
  text "RX6" at 7264,3200 h50 r270
  text "TX6" at 7365,3200 h50 r270
  text "PB15" at 7461,3200 h50 r270
  text "PB14" at 7567,3200 h50 r270
  text "PB13" at 7658,3200 h50 r270
  text "SWDCLK" at 5927,3145 h50
  text "PB12" at 7722,3109 h50 r45
  text "3.3V" at 7752,3082 h50 r45
  text "BLUE" at 6241.24,3047.91 h50
  text "GND" at 7723.24,3045 h50
  text "5V SWPS" at 5330,2966 h60
  text "PC10" at 6241.24,2947.22 h50
  text "PB11" at 7716.96,2946 h50
  text "SCL" at 8075.45,2935 h50
  text "SDA" at 8069.36,2856.67 h50
  text "PC11" at 6241.24,2847.13 h50
  text "PB10" at 7711.88,2844 h50
  text "I2C" at 8416,2795 h60 r90
  text "3.3V" at 8071.62,2778.33 h50
  text "PC12" at 6241.24,2747.64 h50
  text "INT1" at 7731.65,2745.18 h50
  text "GND" at 8067,2695 h50
  text "PD2" at 6241.24,2646.94 h50
  text "SDA2" at 7702.82,2644 h50
  text "RED" at 6239.24,2546.85 h50
  text "SCL2" at 7707.76,2545 h50
  text "PC5" at 7735.85,2448.16 h50
  text "PB4" at 6239.24,2447.36 h50
  text "PB5" at 6239.24,2348.36 h50
  text "PC4" at 7735.53,2343.36 h50
  text "PB6" at 6239.24,2249.36 h50
  text "PA7" at 7736.5,2242.91 h50
  text "3.3V" at 8120.75,2204 h50
  text "PB7" at 6239.24,2149.36 h50
  text "PA6" at 7736.08,2143 h50
  text "GND" at 8116.13,2104 h50
  text "BOOT0" at 6239.24,2049.36 h50
  text "PA5" at 7735.85,2042 h50
  text "3.3V VREG" at 5295,2004 h60
  text "SWDIO" at 8063,1997 h50
  text "PB8" at 6239.24,1948.36 h50
  text "PA4" at 7735.53,1946.27 h50
  text "SWDCLK" at 8016.66,1904 h50
  text "PB9" at 6239.24,1849.36 h50
  text "PROGRAM PORT" at 8390,1849 h60 r90
  text "3.3V" at 7727.86,1846.18 h50
  text "VDDA" at 7467,1753 h50 r270
  text "GND" at 6239.24,1747.36 h50
  text "GND" at 7723.24,1746.09 h50
  text "NRST" at 6866,1744 h50 r270
  text "CTS2" at 7566,1737 h50 r270
  text "PC14" at 6465,1736 h50 r270
  text "RTS2" at 7665,1736 h50 r270
  text "PC15" at 6565,1734 h50 r270
  text "PC13" at 6364,1731 h50 r270
  text "GND" at 7366,1720 h50 r270
  text "PC0" at 6964,1706 h50 r270
  text "PC2" at 7168.47,1705.61 h50 r270
  text "PC3" at 7261,1706 h50 r270
  text "PC1" at 7065,1704 h50 r270
  text "RX2" at 7733,1700 h50 r330
  text "TX2" at 7711,1666 h50 r330
  text "3.3V" at 6257.46,1653.9 h50 r45
  text "3.3V" at 6285,1624 h50 r45
  text "PWM" at 5431.2,1448.76 h50 r270
  text "GND" at 5334.2,1441 h50 r270
  text "RX1" at 5528.8,1422.43 h50 r270
  text "TX1" at 5236,1419.75 h50 r270
  text "5V" at 5627,1398.77 h50 r270
  text "E-41 LIDAR" at 7706.5,1325 h100
  text "DEV BOARD" at 7723,1253 h80
  text "Mar. 13, 2019" at 7888,1194 h50
  text "LIDAR TO CAMERA" at 6937,1175 h60
  text "LIDAR COMMUNICATION" at 5128,1168 h60